# Altium PCB rota2.PcbDoc
Units mil, origin at the board's own origin, x right, y up, seen from the top; angles counter-clockwise.
Board outline 6000 x 4000 mil, 2 copper layers (Top Layer, Bottom Layer); 3 components, 0 nets, 15 pads, 8 vias.
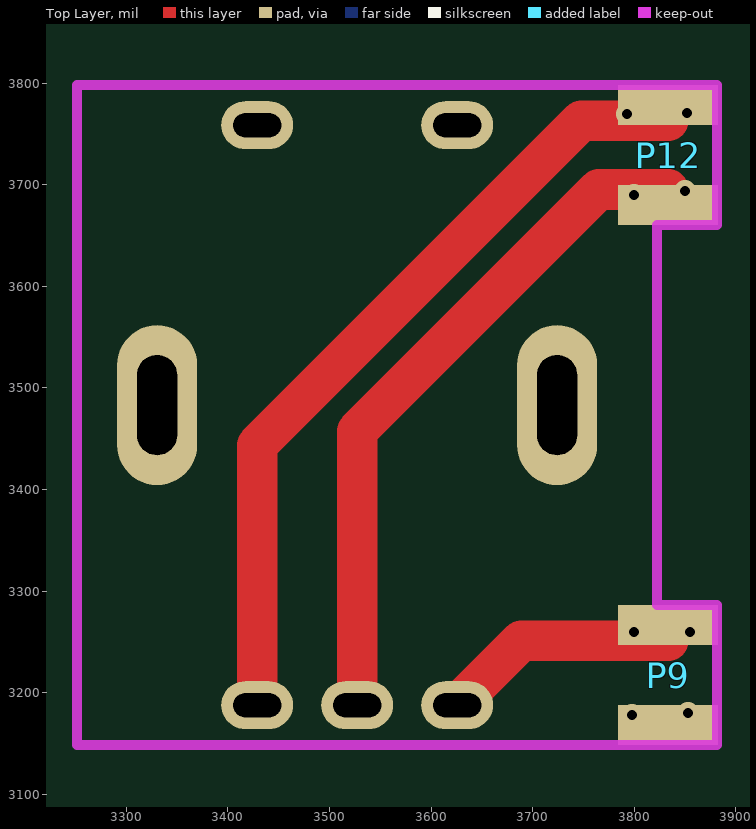
[diagram p0: Top Layer view]
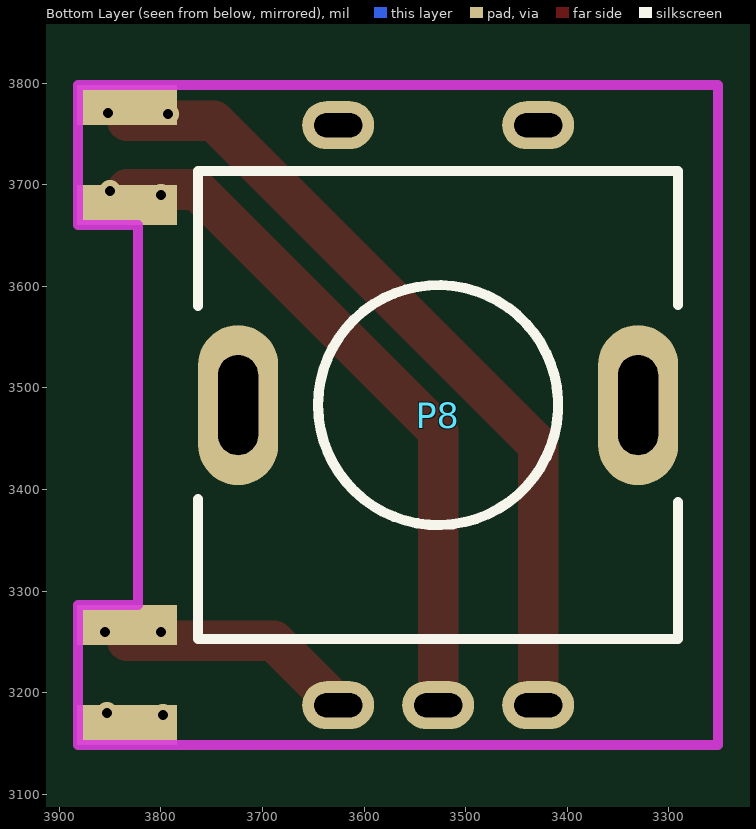
[diagram p1: Bottom Layer view, seen from below]

## Layer stack, top to bottom
Top Layer: signal copper 1.4
Dielectric: dielectric 12.6, FR-4, Dk 4.8
Bottom Layer: signal copper 1.4

## Board outline
1000,1000 7000,1000 7000,5000 1000,5000

## Design rules (kind name [scope] priority, off if disabled: settings)
Clearance [All] p1: gap=10
PolygonConnect [All] p1: connectstyle=Relief reliefconductorwidth=10 reliefentries=4 polygonreliefangle="90 Angle" airgapwidth=10
RoutingVias [All] p1: holewidth=28 width=50 viastyle="Through Hole" minholewidth=28 minwidth=50 maxholewidth=28 maxwidth=50
SolderMaskExpansion [All] p1: expansion=4
Width [All] p1: maxlimit=10 minlimit=10 preferedwidth=10
28 further rules are at their usual default settings.

## Components (designator, comment, footprint, x,y, rotation, side; value= is the part's Value field where it differs from the comment)
P8 "ROTA" rotation_key 3527.17,3483.07 r180 bottom locked
P9 "Header 2" ROTA-2PIN 3833.27,3266.54 r0 top
P12 "Header 2" ROTA-2PIN 3833.27,3778.35 r0 top

## Footprints (in the part's own frame and the unit in brackets; to place one, negate y for a bottom-side part, rotate by r counter-clockwise, add the part's x,y. Pads: shape width x height; smd on the part's side, far side on the other; paste and mask are expansions set on the pad)
ROTA-2PIN [mm]
  rect 2.5x1 smd: 1(0,0) 2(0,-2.5)
  rect 2.5x1 smd far side: 1(0,0) 2(0,-2.5)
rotation_key [mm]
  oval 2x4 hole 1 slot 2.5 at 90 deg: 1(-5,0) 2(5,0)
  oval 1.8x1.2 hole 0.6 slot 1.2 at 0 deg: 3(-2.5,-7.5) 4(0,-7.5) 5(2.5,-7.5) 6(2.5,7) 7(-2.5,7)
  silkscreen extent -6,-5.85 6,5.85

## Part data
P8: library part "Header 7", "Header, 7-Pin"
P9 P12: "Header, 2-Pin"

## Via types
v1: diameter 21.65, hole 9.84, Top Layer to Bottom Layer, 8 vias

## Nets (pads, with @x,y where several pads share a name; then routed paths per layer and width w, separated by ;. In a path a pad name is that pad's centre, name@x,y a point inside that pad or via, vN(x,y) a via of type N, cw(c..) or ccw(c..) an arc to the next point about the centre after c; other vN are vias at no path point)
pads on no net: P8.1 P8.2 P8.3 P8.4 P8.5 P8.6 P8.7 P9.1 P9.2 P12.1 P12.2
copper on no net: | length 1700.9
  Top Layer w40: 3428.74,3187.8 3428.74,3443.7 3748.07,3763.03 3833.27,3763.03 ; 3527.17,3187.8 3527.17,3457.48 3764.92,3695.24 3833.27,3695.24 ; 3625.59,3187.8 3689.02,3251.22 3833.27,3251.22
  other v1: 3797.83,3177.95 3852.95,3179.92 3799.8,3259.65 3854.92,3259.65 3799.8,3689.76 3850,3693.7 3792.91,3769.49 3851.97,3770.47

## Keep-outs
Keep-Out Layer:
  lines w10: 3251.57,3148.43 3251.57,3798.03 3881.5,3798.03 3881.5,3660.24 3822.44,3660.24 3822.44,3286.22 3881.5,3286.22 3881.5,3148.43 3251.57,3148.43